# EAGLE board CARLA_PCB_v1_1 (EAGLE 9.4.2)
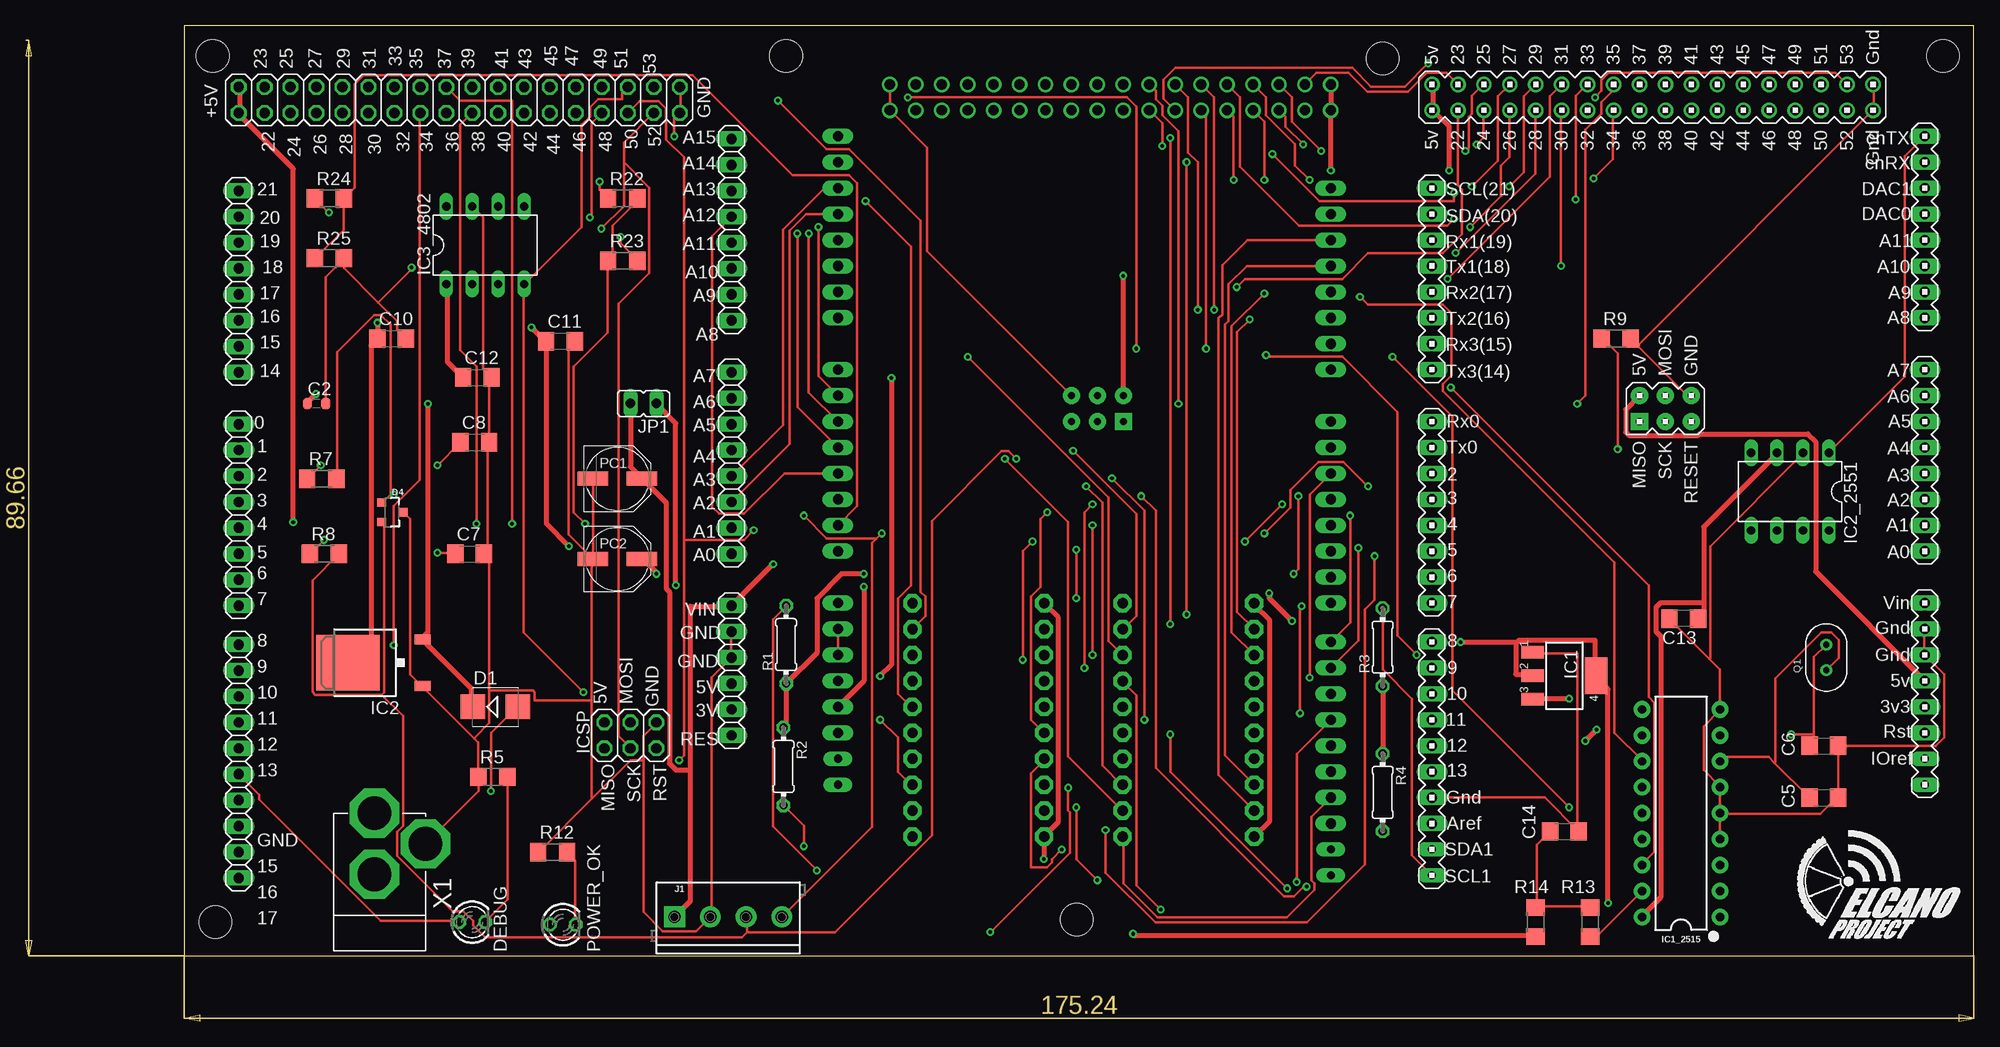
[diagram p0: board, top side]
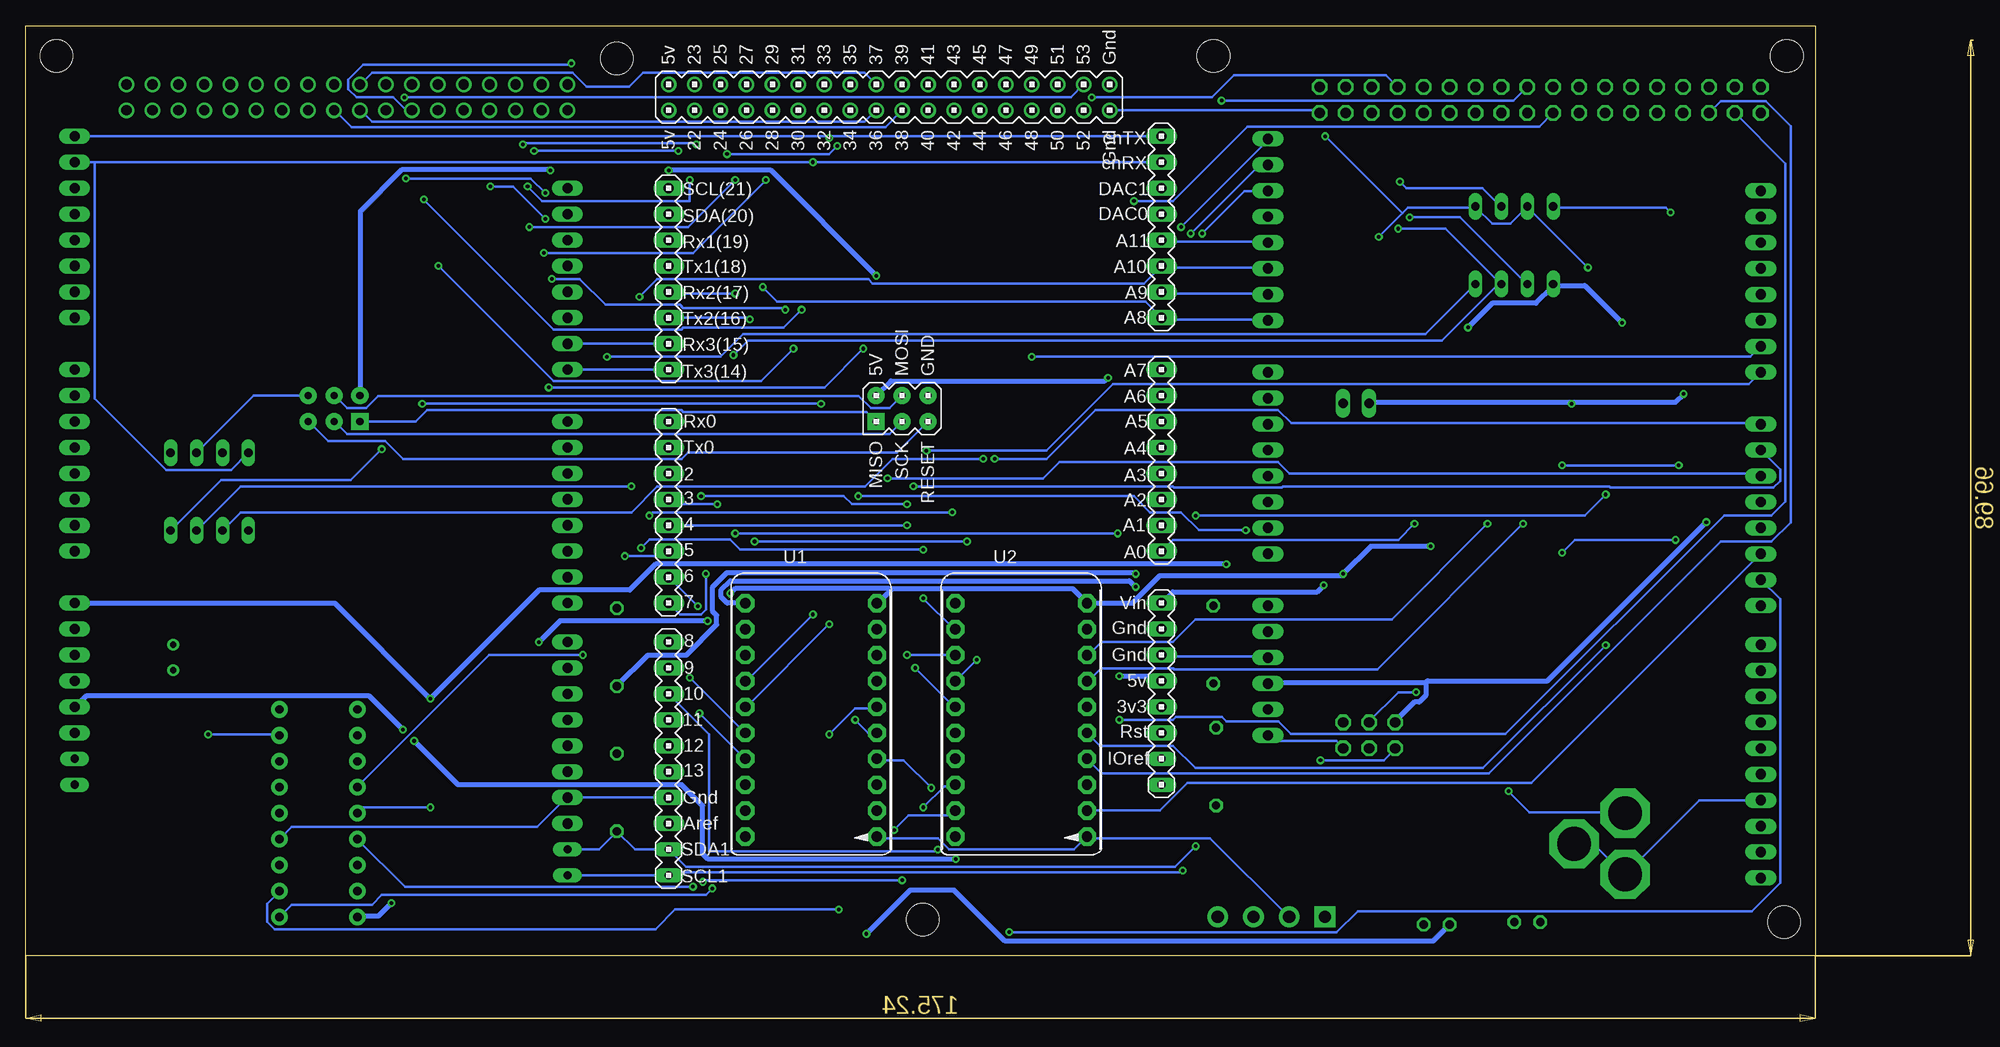
[diagram p1: board, bottom side, seen from below]

Size 175.24 x 91.11 mm. Coordinates in mm from the lower left corner, seen from the top.
Outline: 0,0 175.24,0 175.24,91.11 0,91.11 0,0
Copper layers (1*16): Top 0.035mm / dielectric 1.5mm / Bottom 0.035mm
Design rules "default": minimum track width 6mil, minimum drill 0.35mm, track to track 6mil, track to pad 6mil, pad to pad 6mil, via to via 6mil, smd to smd 6mil, copper to edge 40mil, drill to drill 6mil, minimum pad ring 10mil, minimum via ring 8mil, stop-mask expansion 4mil, vias tented up to drill 0mil, thermal gap 10mil
Net classes: 0 default: width 0.254 mm, drill 0.305 mm, clearance 0.254 mm; 1 Power: width 0.508 mm, drill 0.305 mm, clearance 0.254 mm; 3 SPI_Signals: width 0.254 mm, clearance 0.254 mm; 4 Oscillator: width 0.254 mm, clearance 0.508 mm
Holes 3.2 mm at 2.79,88.14 172.21,88.14 87.38,3.56 58.93,88.14 117.35,87.88 3.05,3.3

## Footprints (pad centres in the part's own frame; a part is rotated, then mirrored left to right if it is on the bottom)
1X08 = drill 1.016 long: 1 -8.89,0; 2 -6.35,0; 3 -3.81,0; 4 -1.27,0; 5 1.27,0; 6 3.81,0; 7 6.35,0; 8 8.89,0
C0603-ROUND = smd 0.898 x 1.1: 1 -0.889,0; 2 0.889,0
C1206 = smd 1.6 x 1.8: 1 -1.4,0; 2 1.4,0
SMB = smd 2.4 x 2.4: A 2.2,0; C -2.2,0
SPARKFUN-DISCRETESEMI_SOT23-3 = smd 0.8 x 0.9: 1 -0.95,-1; 2 0.95,-1; 3 0,1.1
LED3MM = drill 0.813 octagon: A -1.27,0; K 1.27,0
1X10 = drill 1.016 long: 1 -11.43,0; 2 -8.89,0; 3 -6.35,0; 4 -3.81,0; 5 -1.27,0; 6 1.27,0; 7 3.81,0; 8 6.35,0; 9 8.89,0; 10 11.43,0
SOT223 = smd 1.219 x 2.235: 1 -2.311,-3.099; 2 0,-3.099; 3 2.311,-3.099 | smd 3.6 x 2.2: 4 0,3.099
DIP18 = drill 0.813 pad 1.626: 1 -10.16,-3.81; 2 -7.62,-3.81; 3 -5.08,-3.81; 4 -2.54,-3.81; 5 0,-3.81; 6 2.54,-3.81; 7 5.08,-3.81; 8 7.62,-3.81; 9 10.16,-3.81; 10 10.16,3.81; 11 7.62,3.81; 12 5.08,3.81; 13 2.54,3.81; 14 0,3.81; 15 -2.54,3.81; 16 -5.08,3.81; 17 -7.62,3.81; 18 -10.16,3.81
DPACK = smd 1 x 1.6: 1 -2.28,-4.8; 3 2.28,-4.8 | smd 5.4 x 6.2: 2 0,2.5
IC-PACKAGE_DIL08 = drill 0.813 long: 1 -3.81,-3.81; 2 -1.27,-3.81; 3 1.27,-3.81; 4 3.81,-3.81; 5 3.81,3.81; 6 1.27,3.81; 7 -1.27,3.81; 8 -3.81,3.81
DIL08 = drill 0.813 long: 1 -3.81,-3.81; 2 -1.27,-3.81; 3 1.27,-3.81; 4 3.81,-3.81; 5 3.81,3.81; 6 1.27,3.81; 7 -1.27,3.81; 8 -3.81,3.81
2X03 = drill 1.016 octagon: 1 -2.54,-1.27; 2 -2.54,1.27; 3 0,-1.27; 4 0,1.27; 5 2.54,-1.27; 6 2.54,1.27
SCREWTERMINAL-3.5MM-4 = drill 1.2 pad 2.032 square: 1 0,0 | drill 1.2 pad 2.032: 2 3.5,0; 3 7,0; 4 10.5,0
JP1 = drill 0.914 long: 1 0,-1.27; 2 0,1.27
DUE(NORMAL) = drill 1 long: 2 -16.51,30.48; 3 -19.05,30.48; 3V3 -39.37,-17.78; 4 -21.59,30.48; 5 -24.13,30.48; 5V -36.83,-17.78; 6 -26.67,30.48; 7 -29.21,30.48; 8 -33.02,30.48; 9 -35.56,30.48; 10 -38.1,30.48; 11 -40.64,30.48; 12 -43.18,30.48; 13 -45.72,30.48; A0 -24.13,-17.78; A1 -21.59,-17.78; A2 -19.05,-17.78; A3 -16.51,-17.78; A4 -13.97,-17.78; A5 -11.43,-17.78; A6 -8.89,-17.78; A7 -6.35,-17.78; A8 -1.27,-17.78; A9 1.27,-17.78; A10 3.81,-17.78; A11 6.35,-17.78; AREF -50.8,30.48; CANRX 13.97,-17.78; CANTX 16.51,-17.78; DAC0 8.89,-17.78; DAC1 11.43,-17.78; GND1 -48.26,30.48; GND_1 -34.29,-17.78; GND_2 -31.75,-17.78; RESET -41.91,-17.78; RX0 -11.43,30.48; RX1 6.35,30.48; RX2 1.27,30.48; RX3 -3.81,30.48; SCL 11.43,30.48; SDA 8.89,30.48; TX0 -13.97,30.48; TX1 3.81,30.48; TX2 -1.27,30.48; TX3 -6.35,30.48; VIN -29.21,-17.78 | drill 1: 5V_A 19.05,30.48; 5V_B 21.59,30.48; 22 19.05,27.94; 23 21.59,27.94; 24 19.05,25.4; 25 21.59,25.4; 26 19.05,22.86; 27 21.59,22.86; 28 19.05,20.32; 29 21.59,20.32; 30 19.05,17.78; 31 21.59,17.78; 32 19.05,15.24; 33 21.59,15.24; 34 19.05,12.7; 35 21.59,12.7; 36 19.05,10.16; 37 21.59,10.16; 38 19.05,7.62; 39 21.59,7.62; 40 19.05,5.08; 41 21.59,5.08; 42 19.05,2.54; 43 21.59,2.54; 44 19.05,0; 45 21.59,0; 46 19.05,-2.54; 47 21.59,-2.54; 48 19.05,-5.08; 49 21.59,-5.08; 50 19.05,-7.62; 51 21.59,-7.62; 52 19.05,-10.16; 53 21.59,-10.16; GND_A 19.05,-12.7; GND_B 21.59,-12.7 | drill 0.7 pad 1.676: 5V_ICSP -8.89,5.08; GND_ICSP -8.89,10.16; MOSI_ICSP -8.89,7.62; RESET_ICSP -11.43,5.08; SCK_ICSP -11.43,7.62 | drill 0.8 pad 1.422 long: IOREF -44.45,-17.78; NC -46.99,-17.78; SCL1 -55.88,30.48; SDA1 -53.34,30.48 | drill 0.7 pad 1.676 square: MISO_ICSP -11.43,10.16
PINHEAD_2X18 = drill 1.016 octagon: 1 -21.59,-1.27; 2 -21.59,1.27; 3 -19.05,-1.27; 4 -19.05,1.27; 5 -16.51,-1.27; 6 -16.51,1.27; 7 -13.97,-1.27; 8 -13.97,1.27; 9 -11.43,-1.27; 10 -11.43,1.27; 11 -8.89,-1.27; 12 -8.89,1.27; 13 -6.35,-1.27; 14 -6.35,1.27; 15 -3.81,-1.27; 16 -3.81,1.27; 17 -1.27,-1.27; 18 -1.27,1.27; 19 1.27,-1.27; 20 1.27,1.27; 21 3.81,-1.27; 22 3.81,1.27; 23 6.35,-1.27; 24 6.35,1.27; 25 8.89,-1.27; 26 8.89,1.27; 27 11.43,-1.27; 28 11.43,1.27; 29 13.97,-1.27; 30 13.97,1.27; 31 16.51,-1.27; 32 16.51,1.27; 33 19.05,-1.27; 34 19.05,1.27; 35 21.59,-1.27; 36 21.59,1.27
PANASONIC_D = smd 3 x 1.4: + 2.4,0; - -2.4,0
1X06 = drill 1.016 long: 1 -6.35,0; 2 -3.81,0; 3 -1.27,0; 4 1.27,0; 5 3.81,0; 6 6.35,0
XTAL_ECS-160-20-46X = drill 0.63 pad 1.03: 1 -1.25,0; 2 1.25,0
0204/7 = drill 0.813 octagon: 1 -3.81,0; 2 3.81,0
R1206 = smd 1.6 x 1.803: 1 -1.422,0; 2 1.422,0
ELSHIFTER = drill 1.016 pad 1.778 octagon: 1 -5.2,24.63; 2 -5.2,22.09; 3 -5.2,19.55; 4 -5.2,17.01; 5 -5.2,14.47; 6 -5.2,11.93; 7 -5.2,9.39; 8 -5.2,6.85; 9 -5.2,4.31; 10 -5.2,1.77; 11 7.69,24.63; 12 7.69,22.09; 13 7.69,19.55; 14 7.69,17.01; 15 7.69,14.47; 16 7.69,11.93; 17 7.69,9.39; 18 7.69,6.85; 19 7.69,4.31; 20 7.69,1.77
DC-21MM = drill 3.302 pad 4.826 octagon: 1 -5.08,-3.353; 2 -0.076,-6.35; 3 -0.076,-0.356

## Placement (x,y rotation side)
ADCH  Analog In 8-15  [1X08]  53.59,71.12 270 top
ADCL  Analog In 0-7  [1X08]  53.59,48.26 270 top
C2  100n  [C0603-ROUND]  12.95,54.1 0 top
C5  33pF  [C1206]  160.53,15.49 0 top
C6  33pF  [C1206]  160.53,20.57 0 top
C7  560pF  [C1206]  27.94,39.37 0 top
C8  560pF  [C1206]  28.45,50.29 0 top
C10  0.1uF  [C1206]  20.32,60.45 0 top
C11  0.1uF  [C1206]  36.83,60.2 0 top
C12  0.1uF  [C1206]  28.7,56.64 0 top
C13  0.1uF  [C1206]  146.81,33.02 180 top
C14  0.1uF  [C1206]  135.13,12.19 0 top
D1  M7  [SMB]  30.48,24.38 0 top
D4  PESD1CAN  [SPARKFUN-DISCRETESEMI_SOT23-3]  20.32,43.43 270 top
DEBUG  [LED3MM]  28.19,3.3 0 top
DIGITAL_0-7  Digital 0-7  [1X08]  5.33,43.18 270 top
DIGITAL_8-13  Digital 8-13  [1X10]  5.33,19.05 270 top
DIGITAL_14-21  Digital 14-21  [1X08]  5.33,66.04 270 top
IC1  MC33269ST-5.0T3  [SOT223]  135.13,27.43 270 top
IC1_2515  MCP2515  [DIP18]  146.56,13.97 90 top
IC2  MC33269D-5.0  [DPACK]  18.54,28.7 90 top
IC2_2551  MCP2551DIL08  [IC-PACKAGE_DIL08]  157.23,45.47 180 top
IC3_4802  MCP4802  [DIL08]  29.46,69.6 0 top
ICSP  2x3  [2X03]  43.69,21.59 0 top
J1  [SCREWTERMINAL-3.5MM-4]  48.01,3.81 0 top
JP1  [JP1]  44.96,54.1 90 top
MCU2  DUE(NORMAL)  [DUE(NORMAL)]  81.79,63.75 90 bottom
MCU3  DUE(NORMAL)  [DUE(NORMAL)]  152.65,63.75 90 top
MEGA_EXPANSION  Digital 22-53  [PINHEAD_2X18]  26.92,83.82 180 top
PC1  47u  [PANASONIC_D]  42.42,46.74 0 top
PC2  47u  [PANASONIC_D]  42.42,38.86 0 top
POWER  [1X06]  53.59,27.94 90 top
POWER_OK  [LED3MM]  37.08,3.05 0 top
Q1  16MHz  [XTAL_ECS-160-20-46X]  160.78,29.21 90 top
R1  4.7 k  [0204/7]  58.93,30.48 90 top
R2  4.7 k  [0204/7]  58.67,18.54 270 top
R3  4.7 k  [0204/7]  117.35,30.23 90 top
R4  4.7 k  [0204/7]  117.35,16 270 top
R5  1K  [R1206]  30.23,17.53 0 top
R7  100  [R1206]  13.46,46.74 0 top
R8  100  [R1206]  13.72,39.37 0 top
R9  4.7K  [R1206]  140.21,60.45 0 top
R12  1K  [R1206]  36.07,10.16 0 top
R13  1K  [R1206]  137.67,3.3 90 top
R14  20K  [R1206]  132.33,3.3 90 top
R22  2.2K  [R1206]  42.93,74.17 0 top
R23  3.3K  [R1206]  42.93,68.07 0 top
R24  2.2K  [R1206]  14.22,74.17 0 top
R25  3.3K  [R1206]  14.22,68.33 0 top
U1  LLSHIFTER  [ELSHIFTER]  99.57,9.91 0 bottom
U2  LLSHIFTER  [ELSHIFTER]  78.99,9.91 0 bottom
X1  DC21MMX  [DC-21MM]  18.54,7.62 180 top

## Library data of the parts
ADCH ADCL DIGITAL_0-7 DIGITAL_8-13 DIGITAL_14-21 ICSP POWER = pinhead
C2 = SmartPrj
C5-C8 C10-C14 R1-R5 R7-R9 R12-R14 R22-R25 = resistor
D1 = diode
D4 = elcanoParts; SPICEPREFIX: J
DEBUG POWER_OK = led
IC1 IC2 = linear
IC1_2515 = SparkFun-IC-Comms; PROD_ID: NA-XXXXX; SPICEPREFIX: X
IC2_2551 = elcanoParts; SPICEPREFIX: X
IC3_4802 = ic-package
J1 = SparkFun-Connectors; PROD_ID: 2xCONN-08399; SF_ID: 2xPRT-08084
JP1 = jumper
MCU2 MCU3 = DUElib130425
MEGA_EXPANSION = elcanoParts
PC1 PC2 = rcl
Q1 = elcanoParts; DESCRIPTION: Crystal 16MHz ±30ppm _Tol_ ±50ppm _Stability_ 20pF FUND 50Ohm; DIGI-KEY_PART_NUMBER: XC1759-ND; DIGI-KEY_PURCHASE_URL: https://www.digikey.com/product-detail/en/ecs-inc/ECS-160-20-46X/XC1759-ND/2676589?utm_source=snapeda&utm_medium=aggregator&utm_campaign=symbol; MF: ECS Inc.; MP: ECS-160-20-46X; PACKAGE: HC46/X ECS International; SPICEPREFIX: B
U1 U2 = ELCano_Footprints
X1 = powersupply

## Nets
5V [Power]: POWER_OK.A R14.1
+3V3 [Power]: R1.1 R2.1 R3.1 R4.1
+5V [Power]: C10.1 C11.1 C12.1 C13.1 IC1.2 IC1.4 IC1_2515.18 IC2.2 IC2_2551.3 IC3_4802.1 PC2.+ U1.11 U2.11
BRAKE_ON: MEGA_EXPANSION.17 U2.12
BRAKE_PWM: DIGITAL_0-7.3 U1.16
BUZZER: MEGA_EXPANSION.18 U2.14
CAN_INT: ADCH.6 IC1_2515.12 MCU2.A10
CAN_RXD: IC1_2515.2 U1.14
CAN_SS [SPI_Signals]: IC1_2515.16 MEGA_EXPANSION.7
CAN_TXD: IC1_2515.1 U1.15
CANH: D4.1 IC2_2551.7 J1.4 R7.2
CANL: D4.2 IC2_2551.6 J1.3 R8.2
CANRX: IC2_2551.4 MCU2.CANRX MCU3.CANRX U1.4
CANTX: IC2_2551.1 MCU2.CANTX MCU3.CANTX U1.5
CARD_DETECT: MCU2.36 MCU3.36
CS_C5_FRONT: MCU2.37 MCU3.37
CS_C5_REAR: MCU2.38 MCU3.38
CS_GYRO: MCU2.25 MCU3.25
CS_MOUSE: MCU2.32 MCU3.32
CS_SD: MCU2.35 MCU3.35
D_36: MEGA_EXPANSION.20 U2.15
DAC_SS [SPI_Signals]: IC3_4802.2 MEGA_EXPANSION.8
DACA: IC3_4802.8 R24.1
DACB: IC3_4802.6 R22.1
DEBUG_LED: DEBUG.A DIGITAL_8-13.6
DRDY_C: MCU2.26 MCU3.26
DRDY_G: MCU2.24 MCU3.24
EBIKECONTRL: ADCH.3 MCU2.A4
EN: MCU2.31 MCU3.31
ESTOP_INT: ADCH.7 MCU2.A9
FIX: MCU2.30 MCU3.30
FWDSW: MEGA_EXPANSION.22 U2.16
GND: C2.2 C5.2 C6.2 C7.2 C8.2 C10.2 C11.2 C12.2 C13.2 C14.2 D4.3 DIGITAL_8-13.7 IC1.1 IC1_2515.4 IC1_2515.5 IC1_2515.6 IC1_2515.9 IC2.1 IC2_2551.2 IC3_4802.5 IC3_4802.7 ICSP.6 J1.2 MCU2.5V_ICSP MCU2.GND1 MCU2.GND_1 MCU2.GND_2 MCU2.GND_A MCU2.GND_B MCU3.5V_ICSP MCU3.GND1 MCU3.GND_1 MCU3.GND_2 MCU3.GND_A MCU3.GND_B MEGA_EXPANSION.1 MEGA_EXPANSION.2 PC1.- PC2.- POWER.4 POWER.5 R5.1 R9.2 R12.1 R23.2 R25.2 U1.20 U2.20 X1.1 X1.3
GPS_RX: MCU2.TX3 MCU3.TX3
GPS_TX: MCU2.RX3 MCU3.RX3
HALLPHASEA: ADCH.1 MCU2.A6
HALLPHASEB: ADCH.2 MCU2.A5
HALLPHASEC: ADCH.4 MCU2.A3
HIN_ROUT: MCU2.MISO_ICSP MCU3.MISO_ICSP
HL_+3V3 [Power]: MCU3.3V3 U2.1 U2.10
HL_+5V [Power]: MCU3.5V MCU3.5V_A MCU3.5V_B MCU3.GND_ICSP
HOUT_RIN: MCU2.MOSI_ICSP MCU3.MOSI_ICSP
I1: MCU2.27 MCU3.27
I2: MCU2.28 MCU3.28
INT1: MCU2.23 MCU3.23
J_VIN [Power]: JP1.1 MCU2.VIN
L_SENSE: ADCL.6 MCU2.DAC0
LED: MCU2.34 MCU3.34
LL_+3.3V [Power]: POWER.2
LL_+5V [Power]: ICSP.2 MEGA_EXPANSION.35 MEGA_EXPANSION.36 POWER.3
LL_SCK: IC1_2515.13 IC3_4802.3 ICSP.3 MEGA_EXPANSION.4
MISO: IC1_2515.15 ICSP.1 MEGA_EXPANSION.6
MOSI: IC1_2515.14 IC3_4802.4 ICSP.4 MEGA_EXPANSION.5
N$4: C14.1 R13.2 R14.2
N$9: C7.1 R8.1
N$10: C8.1 R7.1
N$12: POWER_OK.K R12.2
N$13: DEBUG.K R5.2
N$14: IC2_2551.8 R9.1
NPD: MCU2.33 MCU3.33
OSC1 [Oscillator]: C6.1 IC1_2515.8 Q1.2
OSC2 [Oscillator]: C5.1 IC1_2515.7 Q1.1
PPS: MCU2.29 MCU3.29
PWRIN: D1.A X1.2
R_+3V3 [Power]: MCU2.3V3 U1.1 U1.10
R_+5V [Power]: MCU2.5V MCU2.5V_A MCU2.5V_B MCU2.GND_ICSP
R_BRAKE_ON: MCU2.9 U2.2
R_BRAKE_PWM: MCU2.2 U1.6
R_BUZZER: MCU2.3 U2.4
R_D_36: MCU2.7 U2.5
R_DACA: MCU2.A1 R24.2 R25.1
R_DACB: MCU2.A0 R22.2 R23.1
R_FWDSW: MCU2.8 U2.6
R_REGEN_ACTIVE: MCU2.11 U2.8
R_REVERSE: MCU2.10 U2.7
R_RX1: MCU2.RX1 U1.9
R_RX3: MCU2.RX2 U1.3
R_SENSE: ADCL.5 MCU2.DAC1
R_STEER_PWM: MCU2.6 U1.7
R_TX1: MCU2.TX1 U1.8
R_TX3: MCU2.TX2 U1.2
R_VOLTAGE_SWITCH: MCU2.4 U2.3
R_WATCHDOG: MCU2.5 U2.9
REGEN_ACTIVE: MEGA_EXPANSION.34 U2.18
RESET: ICSP.5 POWER.1
REVERSE: MEGA_EXPANSION.32 U2.17
RS: IC1_2515.17 R13.1
RST: MCU2.RESET_ICSP MCU3.RESET_ICSP
RX0: DIGITAL_0-7.1 U1.19
RX3: DIGITAL_14-21.7 U1.13
SCK: MCU2.SCK_ICSP MCU3.SCK_ICSP
SCL1: MCU2.SCL1 MCU3.SCL1 R1.2 R3.2
SDA1: MCU2.SDA1 MCU3.SDA1 R2.2 R4.2
SPEEDOMETER: ADCH.5 MCU2.A11
SPI_SLAVE [SPI_Signals]: MEGA_EXPANSION.3
SPI_SS: MCU2.53 MCU3.53
STEER_SERVO_PWM: DIGITAL_0-7.7 U1.17
TX0: DIGITAL_0-7.2 U1.18
TX3: DIGITAL_14-21.8 U1.12
VIN [Power]: C2.1 D1.C IC1.3 IC2.3 J1.1 JP1.2 MCU3.VIN PC1.+ POWER.6
VOLTAGE_SWITCH: MEGA_EXPANSION.19 U2.13
WATCHDOG: DIGITAL_0-7.6 U2.19
WHEELROTATION: ADCH.8 MCU2.A8 MCU3.22

## Tracks (layer width: path | path; a pad name or v marks a point on that pad's centre or on a via)
5V  (via drill 0.35)
  Top 0.508: R14.1 132.21,2 93.06,2 v92.9,2.16
  Bottom 0.508: POWER_OK.A 37.43,1.43 79.31,1.43 84.31,6.43 88.63,6.43 v92.9,2.16
+3V3  (via drill 0.35)
  Top 0.508: R2.1 58.77,22.48 58.93,22.64 R1.1 61.94,29.69 61.94,35.02 64.33,37.4 v66.55,37.4 | R3.1 R4.1
  Bottom 0.508: R3.1 114.3,29.46 110.54,29.46 107.57,32.43 107.57,33.34 107.95,33.72 107.95,36.13 106.55,37.53 66.68,37.53 v66.55,37.4
+5V  (via drill 0.35)
  Top 0.508: 130.37,30.58 130.37,27.56 131.95,27.56 IC1.2 | 130.37,30.58 130.68,30.89 138.14,30.89 138.14,27.56 IC1.4 138.23,27.32 139.41,26.13 v139.41,5.17 | 148.78,34.54 148.78,42.01 155.92,49.15 IC2_2551.3 | 148.78,34.54 148.78,33.59 148.3,33.12 C13.1 | IC1_2515.18 142.75,3.91 144.58,5.73 144.58,31.29 144.1,31.76 144.1,34.13 144.52,34.54 148.78,34.54 | v46.23,37.4 46.23,37.56 44.96,38.83 PC2.+ | v18.92,62.01 18.92,60.58 C10.1 18.76,60.26 18.29,59.79 18.29,31.05 16.06,28.83 IC2.2 | C12.1 27.18,56.77 25.75,58.2 25.75,65.66 IC3_4802.1 | v34,61.53 35.27,60.26 C11.1 35.43,42.32 v37.66,40.1 | v124.97,30.73 130.21,30.73 130.37,30.58 | v108.46,32.8 106.23,35.02 v106.23,35.5
  Bottom 0.508: v139.41,5.17 140.68,3.91 142.75,3.91 IC1_2515.18 | 90.52,35.81 91.79,34.54 U1.11 | v18.92,62.01 22.57,65.66 25.53,65.66 IC3_4802.1 25.75,65.5 27.34,63.91 31.62,63.91 v34,61.53 | v37.66,40.1 43.53,40.1 v46.23,37.4 46.39,37.24 64.17,37.24 66.87,34.54 71.3,34.54 U2.11 72.7,35.93 90.4,35.93 90.52,35.81 | v124.97,30.73 122.9,32.8 v108.46,32.8 | v106.23,35.5 105.76,35.97 90.68,35.97 90.52,35.81
BRAKE_ON  (via drill 0.35)
  Top 0.254: v58.13,83.76 62.9,78.99 65.1,78.99 72.1,71.99 72.1,35.66 72.57,35.19 72.57,33.27 U2.12
  Bottom 0.254: v58.13,83.76 29.56,83.76 28.29,85.03 MEGA_EXPANSION.17
BRAKE_PWM  (via drill 0.35)
  Top 0.254: v90.84,46.77 94.01,43.59 v94.01,23.11
  Bottom 0.254: DIGITAL_0-7.3 5.59,47.24 51.47,47.24 52.6,48.38 73.98,48.38 75.6,46.77 v90.84,46.77 | v94.01,23.11 92.74,21.84 91.95,21.84 U1.16
BUZZER  (via drill 0.35)
  Top 0.254: MEGA_EXPANSION.18 27.02,81.38 27.02,59.31 28.61,57.72 v28.61,42.32
  Bottom 0.254: U2.14 71.16,26.92 69.92,28.16 62.86,28.16 62.77,28.07 42.86,28.07 v28.61,42.32
CAN_INT  (via drill 0.35)
  Top 0.254: IC1_2515.12 142.75,19.15 140.05,21.84 140.05,38.51 123.26,55.31 123.26,56.01 124.06,56.82 124.06,62.95 123.26,63.75 115.92,63.75 v115.12,64.55
  Bottom 0.254: ADCH.6 53.69,67.41 63.85,67.41 MCU2.A10 65.72,65.85 92.3,65.85 92.71,66.26 113.41,66.26 v115.12,64.55
CAN_RXD  (via drill 0.35)
  Top 0.254: v95.6,4.54 93.22,6.92 93.22,25.49 91.88,26.84 U1.14
  Bottom 0.254: v95.6,4.54 111.63,4.54 113.56,2.62 150.86,2.62 151.56,3.32 151.56,5.09 150.37,6.29 IC1_2515.2
CAN_SS  (via drill 0.35)
  Top 0.254: v124.02,55.66 143.38,36.29 143.38,25.34 143.94,24.78 143.94,10.18 142.75,8.98 IC1_2515.16 | v93.22,59.47 93.22,83.14 92.28,84.07 v70.83,84.07
  Bottom 0.254: v70.83,84.07 59.09,84.07 56.93,86.23 42.04,86.23 MEGA_EXPANSION.7 | v124.02,55.66 97.03,55.66 v93.22,59.47
CAN_TXD  (via drill 0.35)
  Top 0.254: v107.98,6.6 96.55,18.03 v96.55,21.69
  Bottom 0.254: v107.98,6.6 108.62,5.97 140.37,5.97 141.32,5.02 149.16,5.02 IC1_2515.1 | v96.55,21.69 94.01,24.23 91.95,24.23 U1.15
CANH  (via drill 0.35)
  Top 0.254: 20.19,45.18 19.4,44.39 D4.1 | v105.76,41.37 108.3,43.91 108.3,45.63 111.04,48.38 113.51,48.38 v115.92,45.97 | 67.74,40.82 67.34,40.42 67.34,12.64 58.61,3.91 J1.4 | 67.74,40.82 v68.29,41.37 | v20.51,45.18 20.19,45.18 | v60.67,43.12 62.9,40.89 67.66,40.89 67.74,40.82 | R7.2 14.95,46.81 14.95,59.11 18.61,62.77 19.24,62.77 20.19,61.81 20.19,45.18
  Bottom 0.254: IC2_2551.7 154.18,45.97 v115.92,45.97 | v68.29,41.37 v105.76,41.37 | v20.51,45.18 22.57,43.12 v60.67,43.12
CANL  (via drill 0.35)
  Top 0.254: 19.32,25.58 19.56,25.81 19.56,42.32 19.4,42.48 D4.2 | 55.12,2.32 55.12,3.75 J1.3 | R8.2 15.14,39.33 12.56,36.75 12.56,25.84 12.83,25.58 19.32,25.58 | 55.12,2.32 54.61,1.81 29.48,1.81 28.29,3 28.29,3.41 27.32,4.38 26.26,4.38 20.83,9.81 20.83,12.16 21.41,12.74 21.41,23.48 19.32,25.58 | 55.12,2.32 63.74,2.32 73.22,11.79 73.22,42.6 80.05,49.43 80.71,49.43 v81.47,48.67
  Bottom 0.254: IC2_2551.6 154.18,43.43 115.92,43.43 113.38,45.97 93.06,45.97 90.36,48.67 v81.47,48.67
CANRX  (via drill 0.35)
  Top 0.254: v98.14,77.72 v98.14,33.43
  Bottom 0.254: MCU3.CANRX 168.47,77.72 | 168.47,77.72 v98.14,77.72 MCU2.CANRX | v98.14,33.43 104.65,26.92 U1.4 | 168.47,77.72 168.47,54.57 161.47,47.57 155.12,47.57 IC2_2551.4
CANTX  (via drill 0.35)
  Top 0.254: v96.55,80.1 v96.55,32.48 | MCU3.CANTX 168.47,78.3 168.47,56.7 IC2_2551.1
  Bottom 0.254: MCU3.CANTX 96.55,80.26 | 96.55,80.26 MCU2.CANTX | v96.55,32.48 104.65,24.38 U1.5 | 96.55,80.26 v96.55,80.1
CARD_DETECT
  Bottom 0.254: MCU3.36 142.43,82.8 141.3,81.67 93.08,81.67 MCU2.36
CS_C5_FRONT
  Bottom 0.254: MCU3.37 142.43,85.34 141.3,86.48 121.66,86.48 120.32,85.14 116.12,85.14 114.78,86.48 93.08,86.48 MCU2.37
CS_C5_REAR
  Bottom 0.254: MCU3.38 144.97,82.8 143.33,81.16 91.05,81.16 MCU2.38
CS_GYRO  (via drill 0.35)
  Top 0.254: MCU2.25 108.46,84.07 108.46,81.69 v111.32,78.83 | v125.44,78.83 125.76,79.15 125.76,82.17 126.08,82.49 126.08,84.23 127.19,85.34 MCU3.25
  Bottom 0.254: v125.44,78.83 v111.32,78.83
CS_MOUSE  (via drill 0.35)
  Top 0.254: v121.79,87.41 119.53,85.14 116.21,85.14 114.36,86.99 97.07,86.99 95.89,85.81 95.89,83.94 MCU2.32
  Bottom 0.254: v121.79,87.41 121.95,87.25 142.19,87.25 143.63,85.81 143.63,84.87 142.83,84.07 139.26,84.07 137.99,82.8 MCU3.32
CS_SD  (via drill 0.35)
  Top 0.254: MCU2.35 95.12,84.71 95.12,83.91 95.76,83.28 95.76,82.33 97.34,80.74 v97.34,54.07 | v136.4,54.07 137.19,54.86 137.19,80.9 138.78,82.49 138.78,83.6 139.89,84.71 139.89,85.28 MCU3.35
  Bottom 0.254: v136.4,54.07 136.37,54.1 97.38,54.1 v97.34,54.07
D_36  (via drill 0.35)
  Top 0.254: v66.71,73.91 71.15,69.47 71.15,36.29 69.88,35.02 69.88,25.65 71.15,24.38 U2.15
  Bottom 0.254: v66.71,73.91 62.9,73.91 55.59,81.22 27.02,81.22 25.69,82.55 MEGA_EXPANSION.20
DAC_SS  (via drill 0.35)
  Top 0.254: v39.72,72.33 39.88,72.48 39.88,81.53 MEGA_EXPANSION.8
  Bottom 0.254: v39.72,72.33 34.8,72.33 28.29,65.82 IC3_4802.2
DACA  (via drill 0.35)
  Top 0.254: v14.16,72.8 12.89,74.07 R24.1
  Bottom 0.254: v14.16,72.8 14.64,73.28 25.59,73.28 IC3_4802.8
DACB  (via drill 0.35)
  Top 0.254: v40.67,75.82 40.67,75.02 41.47,74.23 R22.1
  Bottom 0.254: v40.67,75.82 40.04,75.18 32.58,75.18 30.83,73.44 IC3_4802.6
DEBUG_LED
  Top 0.254: DEBUG.A 26.8,3.43 19.21,3.43 7.33,15.31 7.33,15.78 DIGITAL_8-13.6
DRDY_C  (via drill 0.35)
  Top 0.254: MCU2.26 105.76,81.69 v105.76,75.98 | v125.92,71.37 128.94,74.39 128.94,77.41 129.73,78.2 129.73,82.74 MCU3.26
  Bottom 0.254: v105.76,75.98 110.36,71.37 v125.92,71.37
DRDY_G  (via drill 0.35)
  Top 0.254: MCU2.24 107.82,82.17 107.82,81.22 v109.57,79.47 | v126.56,79.47 127.19,80.1 127.19,82.74 MCU3.24
  Bottom 0.254: v126.56,79.47 126.43,79.59 109.69,79.59 v109.57,79.47
EBIKECONTRL  (via drill 0.35)
  Top 0.254: MCU2.A4 60.04,53.75 v60.04,70.74
  Bottom 0.254: v60.04,70.74 55.91,74.87 53.66,74.87 ADCH.3
EN  (via drill 0.35)
  Top 0.254: MCU2.31 100.84,84.07 v100.84,63.28 | v123.7,66.29 133.7,76.3 133.7,84.17 MCU3.31
  Bottom 0.254: v100.84,63.28 101,63.44 110.84,63.44 111.16,63.75 118.46,63.75 121,66.29 v123.7,66.29
ESTOP_INT
  Bottom 0.254: MCU2.A9 63.85,64.86 53.69,64.86 ADCH.7
FIX  (via drill 0.35)
  Top 0.254: MCU2.30 100.04,82.33 v100.04,59.47 | v134.81,67.56 134.81,82.8 MCU3.30
  Bottom 0.254: v134.81,67.56 123.52,56.27 103.24,56.27 v100.04,59.47
FWDSW  (via drill 0.35)
  Top 0.254: v20.51,30.42 20.51,44.07 23.05,46.61 23.05,82.49 MEGA_EXPANSION.22
  Bottom 0.254: U2.16 70.04,20.57 62.9,20.57 60.71,18.39 32.54,18.39 v20.51,30.42
GND  (via drill 0.35)
  Top 0.254: MCU3.GND_B 165.45,85.34 165.45,82.8 MCU3.GND_A 142.43,59.88 142.43,59.79 142.35,59.71 | 142.35,59.71 147.19,54.86 MCU3.5V_ICSP | 142.35,59.71 141.64,60.42 R9.2 | MCU3.GND1 133.22,15.49 C14.2 136.4,12.48 136.4,29.62 132.11,29.62 IC1.1 | 149.34,29.07 150.37,28.03 IC1_2515.9 150.37,24.07 148.78,22.48 148.78,18.19 150.37,16.6 IC1_2515.6 IC1_2515.5 150.37,13.91 | 149.34,29.07 145.45,32.96 C13.2 | MCU3.GND_2 170.37,32 170.37,29.46 MCU3.GND_1 172.32,27.58 172.32,21.37 171.52,20.57 161.96,20.57 | 161.96,20.57 161.96,15.49 C5.2 161.8,15.49 160.21,13.91 150.37,13.91 | 150.37,13.91 IC1_2515.4 | 161.96,20.57 C6.2 | 149.34,29.07 149.42,29.15 149.42,40.1 158.5,49.18 IC2_2551.2 | MCU2.GND_2 MCU2.GND_1 | POWER.5 53.53,31.69 53.53,29.3 POWER.4 51.62,27.24 51.62,3.93 J1.2 50.11,2.41 46.83,2.41 44.96,4.29 44.96,19.15 | MEGA_EXPANSION.1 48.61,85.03 48.61,82.64 MEGA_EXPANSION.2 47.97,82.01 v47.97,80.26 | MCU2.GND_B MCU2.GND_A 72.74,79.15 72.74,68.99 MCU2.5V_ICSP | 19,63.99 20.83,62.17 20.83,61.37 21.62,60.58 C10.2 | v42.73,70.42 42.73,69.79 44.32,68.2 R23.2 | IC3_4802.7 28.29,73.28 29.24,72.33 29.24,57.56 30.04,56.77 C12.2 30.04,56.61 29.88,56.45 29.88,50.42 C8.2 29.72,50.26 29.72,39.78 29.4,39.47 C7.2 29.4,39.31 29.88,38.83 29.88,25.97 | 19,63.99 22.26,67.25 v22.26,67.41 | PC1.- 40.04,46.61 40.04,38.99 PC2.- | 39.96,15.42 43.69,19.15 44.96,19.15 | 39.96,15.42 34.8,10.26 R12.1 | 44.96,19.15 44.96,21.53 46.23,22.8 ICSP.6 | 39.88,25.02 39.88,15.49 39.96,15.42 | D4.3 21.46,43.43 22.1,42.8 22.1,27.56 23.21,26.45 IC2.1 23.37,26.29 28.37,21.29 | 28.37,21.29 28.77,20.89 28.77,17.56 R5.1 28.8,16.16 X1.1
  Top 0.254: 39.88,25.02 34.32,25.02 34.32,25.81 34.16,25.97 29.88,25.97 | 29.88,25.97 29.88,22.8 28.37,21.29 | C2.2 13.84,66.45 15.65,68.26 R25.2 15.65,67.35 19,63.99 | 39.88,25.02 39.88,38.72 PC2.- | PC2.- 37.62,41.26 37.62,59.59 C11.2 | U1.20 91.95,11.61 91.95,7.12 95.29,3.78 107.98,3.78 110.65,6.45 110.65,7.12 110.38,7.38 110.38,13.61 MCU2.GND1
  Bottom 0.254: IC2_2551.2 152.91,54.86 MCU3.5V_ICSP | MCU2.GND1 MCU3.GND1 122.27,15.49 125.13,12.64 149.16,12.64 IC1_2515.4 | MCU2.GND_1 63.85,29.3 53.69,29.3 POWER.4 | MEGA_EXPANSION.2 48.77,82.8 MCU2.GND_A | 40.43,72.72 39.88,73.28 33.37,73.28 IC3_4802.5 33.21,73.28 31.62,71.69 29.88,71.69 28.29,73.28 IC3_4802.7 28.13,73.28 v22.26,67.41 | 40.43,72.72 v42.73,70.42 | X1.1 23.53,10.89 21.62,10.89 18.76,8.03 X1.3 11.35,15.24 DIGITAL_8-13.7 | 40.43,72.72 v47.97,80.26 | J1.2 51.53,3.81 59.25,11.53 71.15,11.53 U2.20 72.57,10.41 84.8,10.41 85.92,11.53 91.73,11.53 U1.20
GPS_RX
  Bottom 0.254: MCU3.TX3 MCU2.TX3
GPS_TX
  Bottom 0.254: MCU3.RX3 MCU2.RX3
HALLPHASEA  (via drill 0.35)
  Top 0.254: MCU2.A6 62.1,56.77 v62.1,71.37
  Bottom 0.254: ADCH.1 53.59,79.88 v62.1,71.37
HALLPHASEB  (via drill 0.35)
  Top 0.254: MCU2.A5 61.15,55.18 v61.15,70.74
  Bottom 0.254: v61.15,70.74 54.48,77.41 53.66,77.41 ADCH.2
HALLPHASEC
  Top 0.254: MCU2.A3 58.77,47.24 54.83,43.31 52.36,43.31 51.69,43.98 51.69,70.48 ADCH.4
HIN_ROUT
  Bottom 0.254: MCU2.MISO_ICSP 92.9,53.28 110.84,53.28 111.02,53.46 135.9,53.46 137.03,52.32 MCU3.MISO_ICSP
HL_+3V3  (via drill 0.35)
  Top 0.508: v137.19,21.05 v138.3,22.16 | v84.17,9.46 84.17,11.53 U2.10 84.33,11.84 85.6,13.11 85.6,33.12 84.33,34.39 U2.1
  Bottom 0.508: v137.19,21.05 132.91,16.76 111,16.76 108.93,14.7 108.93,9.99 108.4,9.46 v84.17,9.46 | MCU3.3V3 170.37,24.38 169.3,25.45 141.59,25.45 v138.3,22.16
HL_+5V  (via drill 0.35)
  Top 0.508: MCU3.5V_B 122.27,85.34 122.27,82.8 MCU3.5V_A 122.43,82.64 123.86,81.22 v123.86,76.93 | MCU3.GND_ICSP 141.15,53.52 141.15,51.27 141.44,50.98 148.23,50.98 148.36,51.11 158.98,51.11 159.73,50.35 159.73,37.62 MCU3.5V
  Bottom 0.508: MCU3.GND_ICSP 142.43,54.93 142.43,72.94 138.35,77.02 123.95,77.02 v123.86,76.93
HOUT_RIN
  Bottom 0.254: MCU3.MOSI_ICSP 144.97,54.86 143.75,53.65 141.9,53.65 140.72,54.83 93.66,54.83 92.48,53.65 90.63,53.65 MCU2.MOSI_ICSP
I1  (via drill 0.35)
  Top 0.254: MCU2.27 105.92,84.07 105.92,82.33 108.78,79.47 108.78,77.41 v110.2,75.98 | v126.08,75.34 128.62,77.88 128.62,84.17 MCU3.27
  Bottom 0.254: v110.2,75.98 110.2,73.91 124.65,73.91 v126.08,75.34
I2  (via drill 0.35)
  Top 0.254: MCU2.28 102.74,82.17 v102.74,75.98 | v124.49,68.83 132.27,76.61 132.27,82.74 MCU3.28
  Bottom 0.254: v102.74,75.98 109.89,68.83 v124.49,68.83
INT1
  Top 0.254: MCU3.23 123.58,86.48 121.66,86.48 119.81,84.63 115.84,84.63 113.99,86.48 110.86,86.48 MCU2.23
J_VIN  (via drill 0.35)
  Top 0.508: v48.13,36.29 48.13,52.16 46.23,54.07 JP1.1
  Bottom 0.508: v48.13,36.29 48.77,35.66 62.9,35.66 MCU2.VIN
L_SENSE
  Top 0.254: ADCL.6 59.25,50.1 59.25,71.02 60.87,72.64 MCU2.DAC0
LED  (via drill 0.35)
  Top 0.254: MCU2.34 95.76,81.53 v95.76,79.31 | v106.55,78.52 111.16,73.91 124.33,73.91 v124.33,74.71 | v137.99,76.14 139.89,78.04 139.89,82.8 MCU3.34
  Bottom 0.254: v95.76,79.31 96.55,78.52 v106.55,78.52 | v124.33,74.71 125.76,76.14 v137.99,76.14
LL_+5V  (via drill 0.35)
  Top 0.508: MEGA_EXPANSION.35 5.43,85.03 5.43,82.64 MEGA_EXPANSION.36 5.33,82.42 10.67,77.09 v10.67,42.48
  Bottom 0.508: 38.13,26.77 38.13,25.49 38.77,24.86 39.24,24.86 41.15,22.95 ICSP.2 | 38.13,26.77 53.53,26.77 POWER.3 | v10.67,42.48 26.23,26.92 37.97,26.92 38.13,26.77
LL_SCK  (via drill 0.35)
  Top 0.254: v40.83,71.21 43.05,73.44 43.05,77.72 | 43.05,77.72 43.05,79.63 MEGA_EXPANSION.4 | ICSP.3 43.69,20.41 42.54,21.56 42.54,63.88 45.53,66.86 45.53,75.25 43.05,77.72 | v120.68,29.46 118.78,31.37 118.78,53.28 113.38,58.67 105.92,58.67 v105.92,58.83
  Bottom 0.254: v40.83,71.21 36.23,71.21 30.83,65.82 IC3_4802.3 31.02,65.79 36.54,60.26 104.49,60.26 v105.92,58.83 | v120.68,29.46 129.85,29.46 142.75,16.57 IC1_2515.13
MISO  (via drill 0.35)
  Top 0.254: v48.45,19.15 48.93,19.62 48.93,40.73 | 48.93,40.73 48.93,78.2 47.18,79.95 47.18,82.96 46.45,83.69 44.58,83.69 MEGA_EXPANSION.6 | v109.89,6.76 109.57,6.76 108.65,5.84 107.67,5.84 95.12,18.39 95.12,43.59 v93.69,45.02 | v55.75,41.69 54.8,40.73 48.93,40.73
  Bottom 0.254: v48.45,19.15 42.26,19.15 41.15,20.26 ICSP.1 | v93.69,45.02 66.71,45.02 65.12,43.43 62.1,43.43 60.36,41.69 v55.75,41.69 | v109.89,6.76 138.08,6.76 IC1_2515.15
MOSI  (via drill 0.35)
  Top 0.254: MEGA_EXPANSION.5 42.89,84.55 42.89,83.91 40.51,83.91 39.72,83.12 39.72,82.17 38.93,81.38 38.93,71.37 33.37,65.82 IC3_4802.4 33.21,65.66 33.21,31.69 v39.08,25.81 | v135.6,14.54 124.17,25.97 124.17,52.8 v118.3,58.67
  Bottom 0.254: v39.08,25.81 40.83,25.81 43.69,22.95 ICSP.4 | v118.3,58.67 107.19,58.67 104.97,60.9 38.16,60.9 IC3_4802.4 | v135.6,14.54 142.18,14.54 IC1_2515.14
N$4
  Top 0.254: 132.43,4.86 132.43,10.89 133.7,12.16 C14.1 | 132.43,4.86 137.67,4.86 R13.2 | 132.43,4.86 R14.2
N$9  (via drill 0.35)
  Top 0.254: v24.8,39.47 26.38,39.47 C7.1 | v13.68,40.73 12.41,39.47 R8.1
  Bottom 0.254: v24.8,39.47 23.53,40.73 v13.68,40.73
N$10  (via drill 0.35)
  Top 0.254: v24.8,48.04 27.02,50.26 C8.1 | v13.37,48.04 12.1,46.77 R7.1
  Bottom 0.254: v13.37,48.04 v24.8,48.04
N$12
  Top 0.254: R12.2 37.5,10.1 38.29,9.3 38.29,3.11 POWER_OK.K
N$13
  Top 0.254: DEBUG.K 29.46,3.33 31.65,5.52 R5.2
N$14  (via drill 0.35)
  Top 0.254: v140.37,49.62 140.37,58.99 138.94,60.42 R9.1
  Bottom 0.254: v140.37,49.62 143.38,46.61 156.08,46.61 IC2_2551.8
NPD  (via drill 0.35)
  Top 0.254: MCU2.33 98.3,84.07 98.3,78.68 99.25,77.72 v99.25,63.28 | v136.24,74.07 136.24,84.23 137.35,85.34 MCU3.33
  Bottom 0.254: v99.25,63.28 101,61.53 110.84,61.53 111.02,61.35 123.52,61.35 v136.24,74.07
OSC1  (via drill 0.35)
  Top 0.254: 159.58,21.69 159.58,20.89 159.26,20.57 C6.1 | 159.58,21.69 v157.35,21.69 | Q1.2 159.58,29.25 159.58,21.69
  Bottom 0.254: v157.35,21.69 150.37,21.69 IC1_2515.8
OSC2
  Top 0.254: 155.69,18.91 155.13,19.46 150.37,19.46 IC1_2515.7 | 155.69,18.91 159.1,15.49 C5.1 | 155.69,18.91 155.77,18.99 155.77,27.15 160.28,31.66 161.28,31.66 161.99,30.96 161.99,29.18 Q1.1
PPS  (via drill 0.35)
  Top 0.254: MCU2.29 103.38,84.07 103.38,77.28 109.15,71.51 123.67,71.51 v124.33,72.17 | v129.73,75.34 131.16,76.77 131.16,84.17 MCU3.29
  Bottom 0.254: v124.33,72.17 127.51,75.34 v129.73,75.34
PWRIN  (via drill 0.35)
  Top 0.254: v30.04,16.13 30.04,21.84 32.58,24.38 D1.A
  Bottom 0.254: v30.04,16.13 27.97,14.06 18.71,14.06 X1.2
R_+3V3  (via drill 0.35)
  Top 0.508: MCU2.3V3 66.55,26.92 v66.55,36.13 | U1.10 104.81,11.68 106.23,13.11 106.23,32.96 104.81,34.39 U1.1
  Bottom 0.508: U1.1 106.54,34.54 107.12,35.13 107.12,35.86 106.25,36.73 67.15,36.73 v66.55,36.13
R_+5V  (via drill 0.35)
  Top 0.508: MCU2.5V_B MCU2.5V_A v112.27,76.93 | v68.14,27.4 69.25,28.51 v69.25,56.61 | MCU2.GND_ICSP v91.95,66.61
  Bottom 0.508: MCU2.5V 64.48,27.4 v68.14,27.4 | v69.25,56.61 69.56,56.29 90.52,56.29 MCU2.GND_ICSP | v112.27,76.93 102.27,76.93 v91.95,66.61
R_BRAKE_ON  (via drill 0.35)
  Top 0.254: MCU2.9 114.97,30.89 v114.97,39.94 | v87.34,35.02 v87.34,39.78
  Bottom 0.254: v87.34,39.78 105.28,39.78 106.26,40.76 114.15,40.76 v114.97,39.94 | v87.34,35.02 84.33,32 U2.2
R_BRAKE_PWM  (via drill 0.35)
  Top 0.254: MCU2.2 110.2,45.18 v110.2,27.24
  Bottom 0.254: v110.2,27.24 104.81,21.84 U1.6
R_BUZZER  (via drill 0.35)
  Top 0.254: v103.85,40.58 v107.51,44.23 | v83.06,40.58 82.11,39.62 v82.11,28.99
  Bottom 0.254: MCU2.3 111.79,44.23 v107.51,44.23 | v83.06,40.58 v103.85,40.58 | v82.11,28.99 84.17,26.92 U2.4
R_D_36  (via drill 0.35)
  Top 0.254: v108.62,37.4 109.09,37.88 v109.09,45.02 | v88.93,44.23 88.14,43.43 v88.14,28.19
  Bottom 0.254: MCU2.7 111.16,33.43 109.09,33.43 108.62,33.91 v108.62,37.4 | v109.09,45.02 95.12,45.02 94.33,44.23 v88.93,44.23 | U2.5 84.32,24.38 v88.14,28.19
R_DACA
  Top 0.254: R25.1 12.89,68.36 15.59,71.06 15.59,74.07 R24.2 16.7,75.22 16.7,85.37 17.56,86.23 49.78,86.23 59.56,76.45 65.1,76.45 65.9,75.65 65.9,44.05 MCU2.A1
R_DACB  (via drill 0.35)
  Top 0.254: R22.2 44.32,74.07 44.32,73.91 41.94,71.53 41.94,68.52 41.62,68.2 R23.1 41.47,68.03 41.47,61.05 38.14,57.73 38.14,43.43 v39.24,42.32
  Bottom 0.254: MCU2.A0 62.9,40.73 40.83,40.73 v39.24,42.32
R_FWDSW  (via drill 0.35)
  Top 0.254: MCU2.8 114.17,32.64 v114.17,43.12 | v84.49,43.43 83.85,42.8 83.85,36.13 82.92,35.2 82.92,23.11 U2.6
  Bottom 0.254: v114.17,43.12 113.86,43.43 v84.49,43.43
R_REGEN_ACTIVE  (via drill 0.35)
  Top 0.254: MCU2.11 108.93,19.78 v108.93,7.24 | v89.41,7.4 87.34,9.46 v87.34,14.54
  Bottom 0.254: v108.93,7.24 108.78,7.4 v89.41,7.4 | v87.34,14.54 85.28,16.6 84.33,16.6 U2.8
R_REVERSE  (via drill 0.35)
  Top 0.254: v85.92,10.41 84.96,9.46 84.96,9.14 84.49,8.67 82.9,8.67 82.9,17.88 84.17,19.15 U2.7
  Bottom 0.254: MCU2.10 108.3,21.69 108.3,10.26 86.07,10.26 v85.92,10.41
R_RX1
  Top 0.254: MCU2.RX1 104.09,70.1 101.63,67.65 101.63,62.8 101.28,62.45 101.28,17.7 U1.9
R_RX3  (via drill 0.35)
  Top 0.254: U1.3 102.55,31.67 102.55,61.66 v105.76,64.86
  Bottom 0.254: MCU2.RX2 112.11,64.86 v105.76,64.86
R_SENSE
  Top 0.254: ADCL.5 58.61,52.01 58.61,71.1 62.69,75.18 MCU2.DAC1
R_STEER_PWM  (via drill 0.35)
  Top 0.254: v109.41,34.23 109.25,34.07 v109.25,23.75
  Bottom 0.254: v109.41,34.23 MCU2.6 | v109.25,23.75 104.81,19.3 U1.7
R_TX1
  Top 0.254: U1.8 101.92,19.61 101.92,61.82 102.27,62.17 102.27,65.78 104.05,67.56 MCU2.TX1
R_TX3  (via drill 0.35)
  Top 0.254: U1.2 103.09,33.67 103.09,61.09 v104.33,62.33
  Bottom 0.254: MCU2.TX2 104.49,62.48 v104.33,62.33
R_VOLTAGE_SWITCH  (via drill 0.35)
  Top 0.254: v88.93,29.46 v88.93,42.16
  Bottom 0.254: v88.93,42.16 MCU2.4 | v88.93,29.46 84.33,29.46 U2.3
R_WATCHDOG  (via drill 0.35)
  Top 0.254: v116.55,39.15 116.55,34.86 115.6,33.91 115.6,8.95 109.92,3.27 95.07,3.27 90.2,8.15 v90.2,12.32
  Bottom 0.254: MCU2.5 112.74,39.15 v116.55,39.15 | v90.2,12.32 88.77,13.75 84.65,13.75 84.33,14.06 U2.9
REGEN_ACTIVE  (via drill 0.35)
  Top 0.254: v68.14,23.11 69.88,21.37 69.88,18.03 71.15,16.76 U2.18
  Bottom 0.254: v68.14,23.11 62.9,23.11 62.62,23.39 58.1,23.39 57.66,22.95 52.58,22.95 51.34,21.72 30.32,21.72 8.92,43.12 4.29,43.12 2.92,44.48 2.92,77.6 MEGA_EXPANSION.34
RESET
  Bottom 0.254: POWER.1 53.05,21.05 46.86,21.05 46.23,20.41 ICSP.5
REVERSE
  Bottom 0.254: U2.17 69.89,17.88 31.94,17.88 9.24,40.58 4.29,40.58 2.41,42.45 2.41,81.24 4.86,83.69 9.27,83.69 MEGA_EXPANSION.32
RS
  Top 0.254: R13.1 137.79,2 138.4,2 IC1_2515.17
RST
  Bottom 0.254: MCU2.RESET_ICSP 89.88,49.31 110.36,49.31 111.02,48.65 138.28,48.65 140.05,50.42 145.61,50.42 147.51,52.32 MCU3.RESET_ICSP
RX0  (via drill 0.35)
  Top 0.254: v80.36,48.67 86.55,42.48 86.55,19.54 U1.19
  Bottom 0.254: v80.36,48.67 75.28,48.67 70.49,53.46 52.6,53.46 51.31,52.16 5.43,52.16 DIGITAL_0-7.1
RX3  (via drill 0.35)
  Top 0.254: v76.71,58.67 90.52,44.86 90.52,30.81 U1.13
  Bottom 0.254: v76.71,58.67 6.38,58.67 5.37,59.69 DIGITAL_14-21.7
SCK
  Bottom 0.254: MCU3.SCK_ICSP 144.97,52.32 143.75,51.11 90.63,51.11 MCU2.SCK_ICSP
SCL1  (via drill 0.35)
  Top 0.254: R1.2 58.93,34.23 57.63,32.93 57.63,12.66 v61.94,8.35 | MCU3.SCL1 120.2,9.84 120.2,25.18 117.35,28.03 R3.2
  Bottom 0.254: MCU3.SCL1 MCU2.SCL1 111.98,8.16 62.14,8.16 v61.94,8.35
SDA1  (via drill 0.35)
  Top 0.254: v60.67,10.73 60.67,12.73 R2.2
  Bottom 0.254: MCU3.SDA1 119.09,10.41 117.35,12.16 R4.2 115.57,10.41 MCU2.SDA1 110.56,8.7 62.7,8.7 v60.67,10.73
SPEEDOMETER
  Bottom 0.254: MCU2.A11 63.85,69.94 53.69,69.94 ADCH.5
SPI_SS  (via drill 0.35)
  Top 0.254: v138.14,84.07 138.78,84.71 138.78,85.77 139.48,86.48 161.68,86.48 MCU3.53
  Bottom 0.254: MCU2.53 72.9,84.07 v138.14,84.07
STEER_SERVO_PWM  (via drill 0.35)
  Top 0.254: v78.93,2.32 86.71,10.1 86.71,14.06 86.55,14.22 v86.55,16.45
  Bottom 0.254: v78.93,2.32 46.86,2.32 44.8,4.38 6.19,4.38 3.43,7.15 3.43,34.93 DIGITAL_0-7.7 | v86.55,16.45 89.25,19.15 91.79,19.15 U1.17
TX0  (via drill 0.35)
  Top 0.254: v88.3,45.97 89.88,44.39 89.88,18.67 91.79,16.76 U1.18
  Bottom 0.254: v88.3,45.97 62.9,45.97 62.77,45.85 52.23,45.85 52.14,45.94 20.16,45.94 20.07,45.85 4.1,45.85 3.43,46.52 3.43,47.62 DIGITAL_0-7.2
TX3  (via drill 0.35)
  Top 0.254: v87.03,49.47 93.22,43.27 93.22,33.27 91.95,32 U1.12
  Bottom 0.254: v87.03,49.47 75.28,49.47 68.75,56 6.52,56 5.37,57.15 DIGITAL_14-21.8
VIN  (via drill 0.35)
  Top 0.508: v135.6,25.18 132.11,25.18 IC1.3 | 49.56,18.19 49.56,34.23 53.53,34.23 POWER.6 v57.66,38.35 | D1.C 28.13,24.38 28.13,26.13 23.37,30.89 IC2.3 23.37,31.21 23.84,31.69 v23.84,54.07 | v12.89,55.02 12.1,54.23 C2.1 | JP1.2 43.69,47.88 44.8,46.77 PC1.+ 47.18,44.37 47.18,35.97 47.5,35.66 47.5,18.84 48.15,18.19 49.56,18.19 | J1.1 49.56,5.37 49.56,18.19
  Bottom 0.508: MCU3.VIN 144.97,34.54 v135.6,25.18 124.97,35.81 116.08,35.81 113.54,38.35 v57.66,38.35 | v12.89,55.02 13.68,54.23 23.84,54.23 | v23.84,54.07 23.84,54.23 | JP1.2 43.56,54.23 23.84,54.23
VOLTAGE_SWITCH  (via drill 0.35)
  Top 0.254: v32.1,42.32 32.1,83.76 27.02,83.76 25.75,85.03 MEGA_EXPANSION.19
  Bottom 0.254: v32.1,42.32 41.47,32.96 60.67,32.96 62.9,30.73 69.88,30.73 71.16,29.46 U2.13
WATCHDOG
  Bottom 0.254: U2.19 71.3,14.22 64.17,14.22 61.47,16.92 27.81,16.92 5.37,39.37 DIGITAL_0-7.6
WHEELROTATION  (via drill 0.35)
  Top 0.254: v103.06,65.5 103.85,66.29 113.38,66.29 115.92,68.83 123.26,68.83 125.09,70.66 125.09,75.06 124.69,75.47 124.69,82.77 MCU3.22
  Bottom 0.254: ADCH.8 53.69,62.33 63.85,62.33 MCU2.A8 65.59,64.07 101.63,64.07 v103.06,65.5

## Text on the board
tNames: 23 | 25 | 27 | 29 | 31 | 33 | 35 | 37 | 39 | 41 | 43 | 45 | 47 | 49 | 51 | 53 | +5V | GND | 22 | 26 | 28 | 30 | 32 | 34 | 36 | 38 | 40 | 42 | 44 | 46 | 48 | 50 | 52 | A15 | 24 | A14 | A13 | 21 | A12 | 20 | A11 | 19 | A10 | 18 | A9 | 17 | 16 | A8 | 15 | 14 | A7 | A6 | A5 | 0 | A4 | 1 | A3 | 2 | A2 | 3 | 4 | A1 | A0 | 5 | 6 | VIN | 7 | GND | 8 | GND | 9 | 5V | 10 | 5V | MOSI | 3V | GND | 11 | RES | 12 | MISO | SCK | RST | 13 | GND | 15 | 16 | 17